# Altium PCB Pas PCB.PcbDoc
Units mil, origin at the board's own origin, x right, y up, seen from the top; angles counter-clockwise.
Board outline 4673 x 4194 mil, 2 copper layers (Top Layer, Bottom Layer), stack 59.091 mil thick; 45 components, 47 nets, 161 pads, 0 vias.
Unrouted connection lines stored in the file: 72.
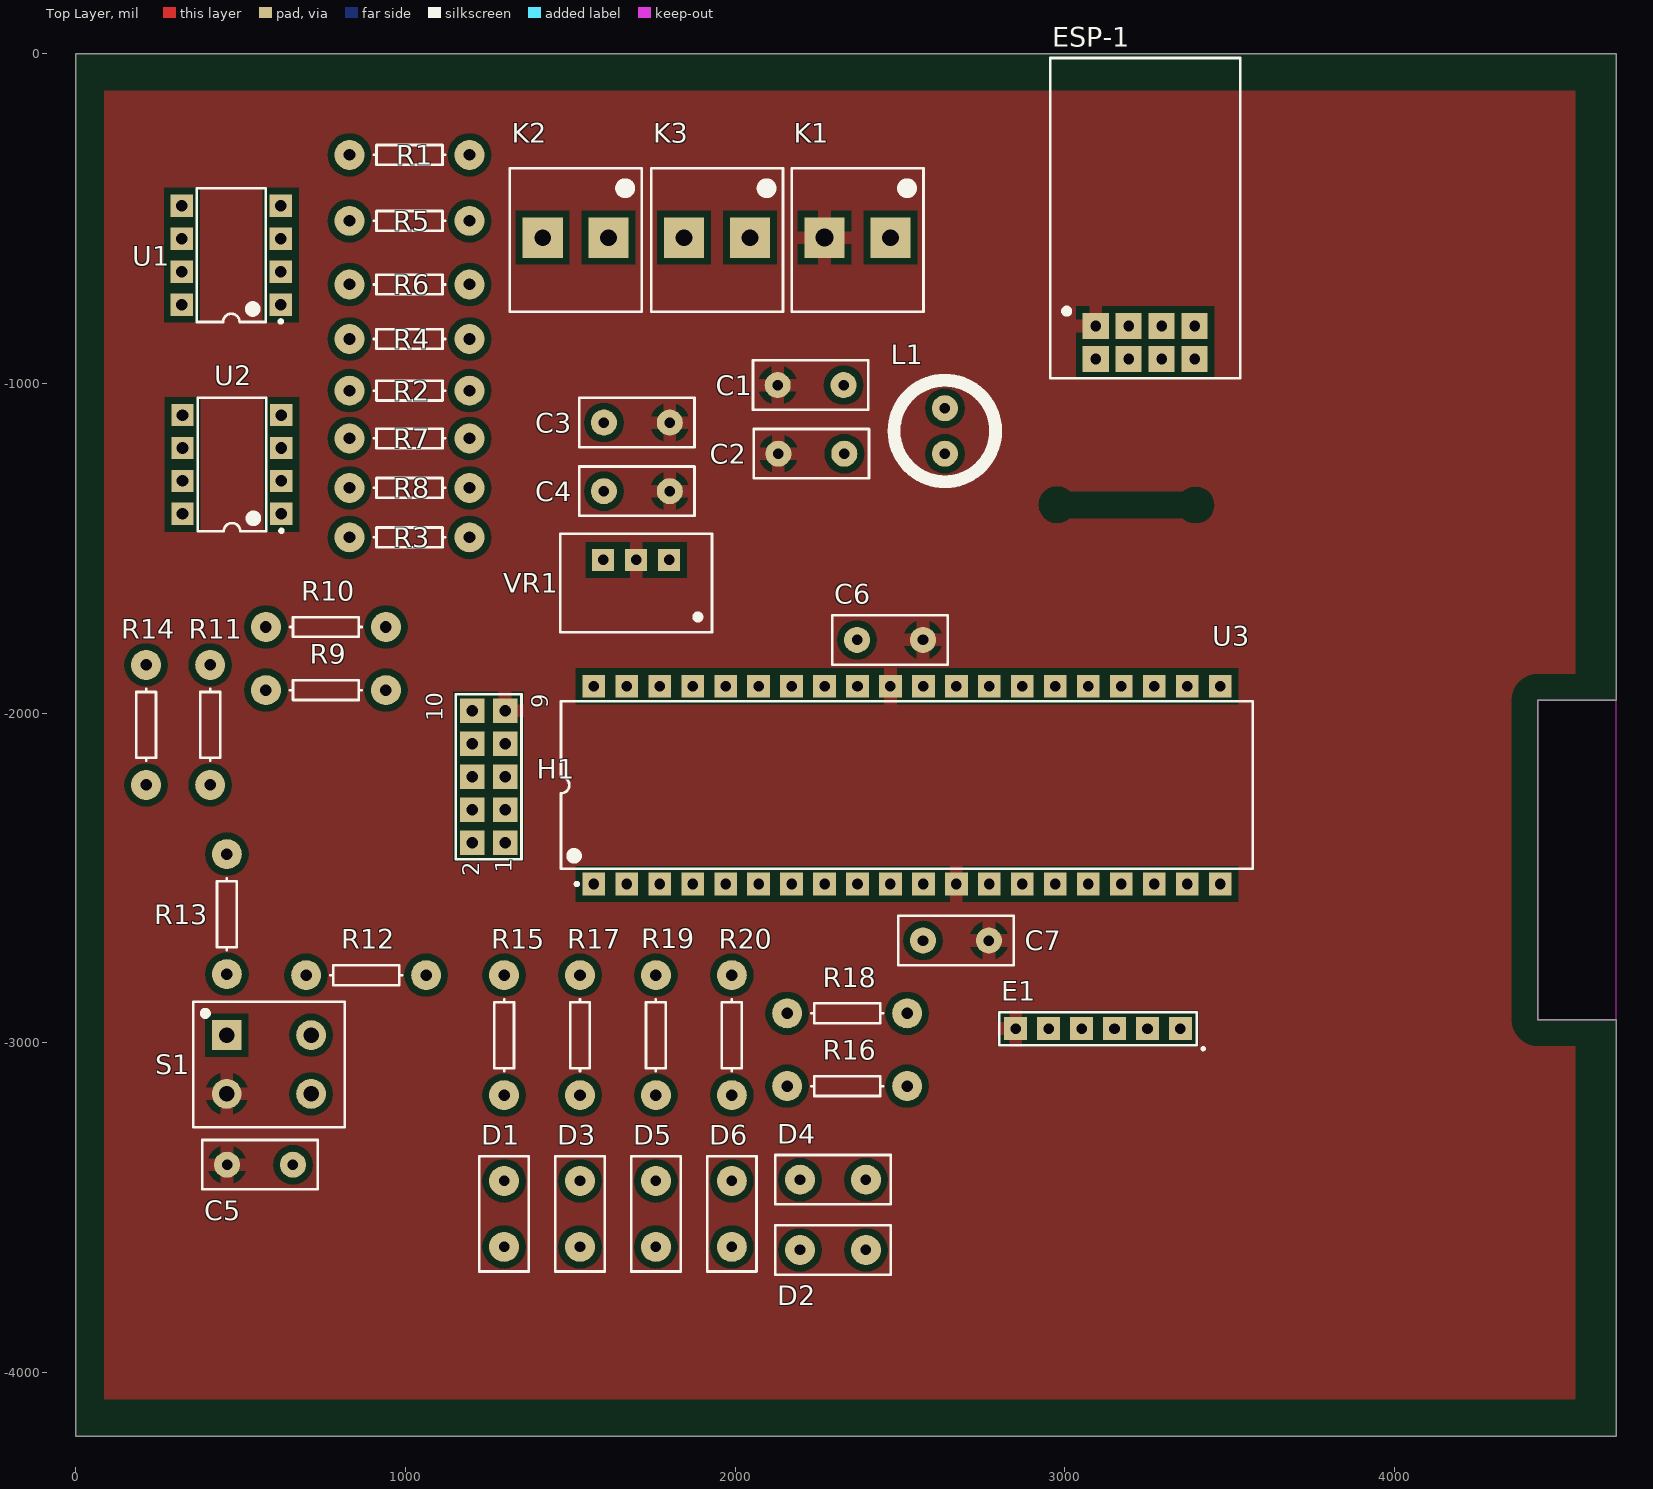
[diagram p0: Top Layer view]
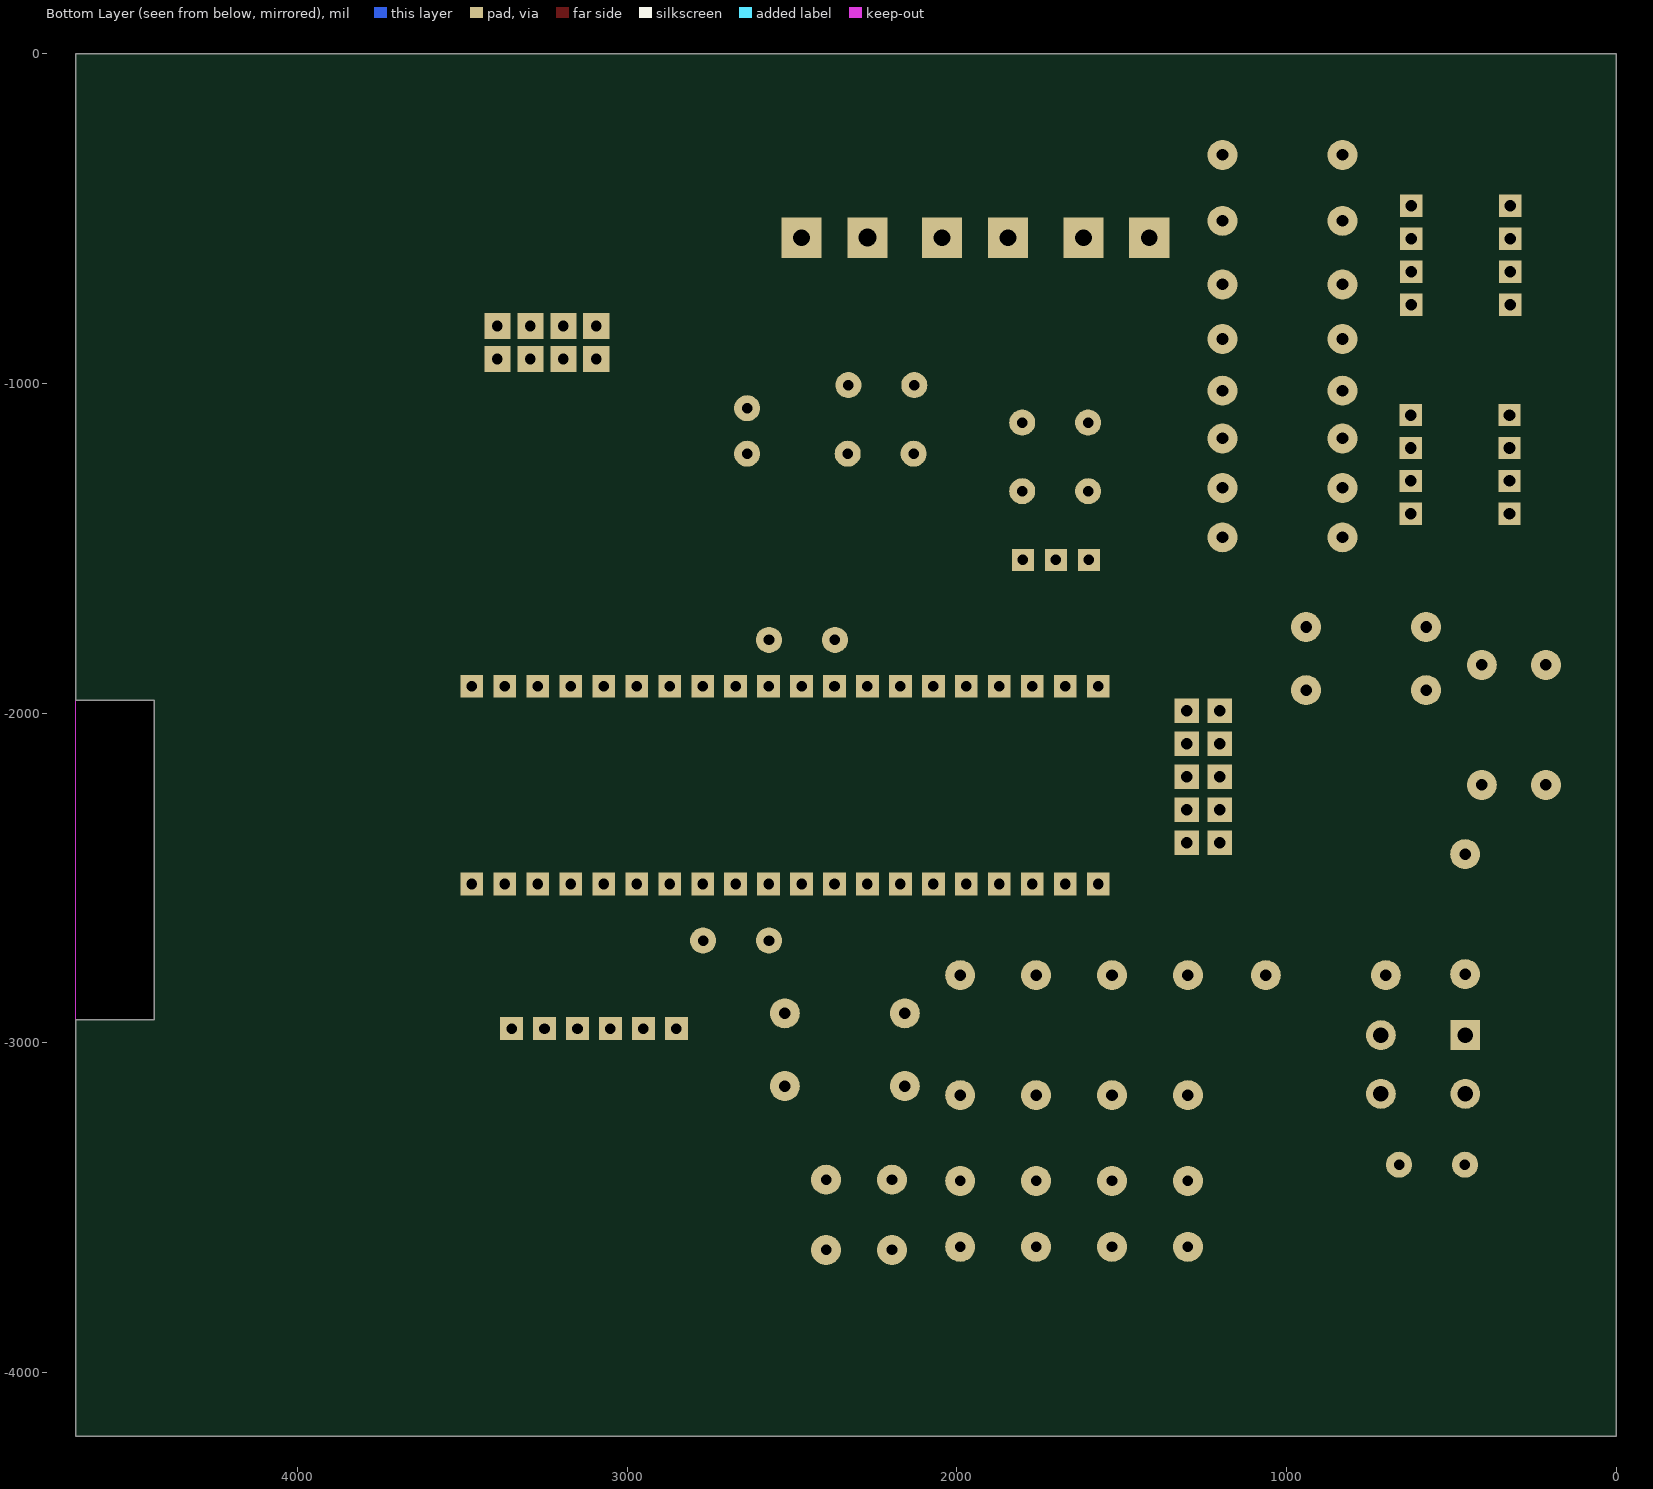
[diagram p1: Bottom Layer view, seen from below]

## Layer stack, top to bottom
Top Layer: signal copper 0.018
Dielectric 1: core 59.055, FR-4, Dk 4.2
Bottom Layer: signal copper 0.018

## Board outline
0,-4194 0,0 4673,0 4673,-1961 4435,-1961 4435,-2930 4673,-2930 4673,-4194
cut-out: 4435,-1961 4435,-2930 4673,-2930 4673,-1961

## Design rules (kind name [scope] priority, off if disabled: settings)
AssemblyTestPointUsage [All] p1 off:
AssemblyTestpoint [All] p1 off: testpointundercomponent=TRUE minsize=40 maxsize=100 preferedsize=60 minholesize=0 maxholesize=40 preferedholesize=32 testpointgrid=1 usegrid=TRUE gridtolerance=0.01 allowsidetop=TRUE allowsidebottom=TRUE
BoardOutlineClearance [Not InComponent('ESP-1')] p1: gap=20 ignorepadtopadclearanceinfootprint=FALSE
Clearance Clearance_1 [IsBoardCutoutRegion vs InPolygon] p1: gap=80 ignorepadtopadclearanceinfootprint=FALSE
Clearance [All] p2: gap=20 ignorepadtopadclearanceinfootprint=FALSE
ComponentClearance [All] p1: gap=20 collisioncheckmode=3 verticalgap=100000 showdistances=FALSE
FabricationTestPointUsage [All] p1 off: valid=0 allowmultiple=FALSE
FabricationTestpoint [All] p1 off: side=3 testpointundercomponent=TRUE minsize=40 maxsize=100 preferedsize=60 minholesize=0 maxholesize=40 preferedholesize=32 testpointgrid=1 allowsidetop=TRUE allowsidebottom=TRUE usegrid=TRUE gridtolerance=0.01
HoleSize [All] p1: absolutevalues=TRUE maxlimit=1380 minlimit=32 maxpercent=80.000 minpercent=20.000
PolygonConnect [All] p1: connectstyle=Relief reliefconductorwidth=40 reliefentries=4 polygonreliefangle="90 Angle" airgapwidth=20
RoutingTopology "Schematic Routing Topology_1" [InNetClass('Power_3.3V')] p1 off: topology=Daisy_Simple
RoutingTopology "Schematic Routing Topology" [InNetClass('Power_24V')] p2 off: topology=Daisy_Simple
RoutingTopology [All] p3: topology=Shortest
RoutingVias [All] p1: holewidth=48 width=71 viastyle="Through Hole" minholewidth=48 minwidth=71 maxholewidth=48 maxwidth=71
SolderMaskExpansion [All] p1: expansion=4
UnConnectedPin [Not InComponent('U3')] p1:
UnRoutedNet [All] p1: checkbadconnections=TRUE
Width Width_Power&GND [(InNetClass('Signal_24V') OR InNetClass('Power_3.3V') OR InNetClass('Power_24V') OR InNetClass('GND'))] p1 off: maxlimit=79 minlimit=31 preferedwidth=39
Width [All] p2: maxlimit=39 minlimit=39 preferedwidth=39
22 further rules are at their usual default settings.

## Classes and differential pairs
net class C7_Nets: 3.3V GND
net class C6_Nets: 3.3V GND
net class VR1_Nets: 3.3V GND NetC2_1
net class U3_Nets: 3.3V GND M\C\L\R\ NetE1_2 NetE1_3 NetH1_3 NetH1_5 NetR9_1 NetR10_1 NetR15_1 NetR16_1 NetR17_2 NetR18_1 NetR19_2 NetR20_2 NetU3_2 NetU3_7 NetU3_10 NetU3_13 NetU3_14 NetU3_15 NetU3_16 NetU3_17 NetU3_18 NetU3_19 NetU3_20 NetU3_21 NetU3_22 NetU3_27 NetU3_28 NetU3_33 NetU3_34 NetU3_35 NetU3_36 RC6 RC7 WIFIMOD_CH-PD WIFIMOD_RST
net class U2_Nets: 3.3V NetR2_1 NetR3_1 NetR7_1 NetR8_1 NetR9_2 NetR10_2
net class U1_Nets: 3.3V NetR1_2 NetR4_1 NetR5_1 NetR6_1 NetR11_2 NetR14_2
net class Signal_24V: NetK2_1 NetK2_2 NetK3_1 NetK3_2 NetR5_1 NetR6_1 NetR7_1 NetR8_1
net class S1_Nets: GND NetC5_1 NetS1_B NetS1_D
net class R20_Nets: NetD6_2 NetR20_2
net class R19_Nets: NetD5_2 NetR19_2
net class R18_Nets: NetD4_2 NetR18_1
net class R17_Nets: NetD3_2 NetR17_2
net class R16_Nets: NetD2_2 NetR16_1
net class R15_Nets: NetD1_2 NetR15_1
net class R14_Nets: NetH1_4 NetR14_2
net class R13_Nets: NetC5_1 NetH1_2
net class R12_Nets: 3.3V NetC5_1
net class R11_Nets: NetH1_6 NetR11_2
net class R10_Nets: NetR10_1 NetR10_2
net class R9_Nets: NetR9_1 NetR9_2
net class R8_Nets: NetK3_1 NetR8_1
net class R7_Nets: NetK3_2 NetR7_1
net class R6_Nets: NetK2_1 NetR6_1
net class R5_Nets: NetK2_2 NetR5_1
net class R4_Nets: NetC1_1 NetR4_1
net class R3_Nets: NetC1_1 NetR3_1
net class R2_Nets: NetC1_1 NetR2_1
net class R1_Nets: NetC1_1 NetR1_2
net class Power_24V: NetC1_1
net class Power_3.3V: 3.3V
net class Pas_Schematic_Nets: 3.3V GND M\C\L\R\ NetC1_1 NetC2_1 NetC5_1 NetD1_2 NetD2_2 NetD3_2 NetD4_2 NetD5_2 NetD6_2 NetE1_1 NetE1_2 NetE1_3 NetE1_4 NetE1_5 NetESP-1_2 NetESP-1_3 NetH1_2 NetH1_3 NetH1_4 NetH1_5 NetH1_6 NetH1_8 NetH1_10 NetK2_1 NetK2_2 NetK3_1 NetK3_2 NetR1_2 NetR2_1 NetR3_1 NetR4_1 NetR5_1 NetR6_1 NetR7_1 NetR8_1 NetR9_1 NetR9_2 NetR10_1 NetR10_2 NetR11_2 NetR14_2 NetR15_1 NetR16_1 NetR17_2 NetR18_1 NetR19_2 NetR20_2 NetS1_B NetS1_D NetU3_2 NetU3_7 NetU3_10 NetU3_13 NetU3_14 NetU3_15 NetU3_16 NetU3_17 NetU3_18 NetU3_19 NetU3_20 NetU3_21 NetU3_22 NetU3_27 NetU3_28 NetU3_33 NetU3_34 NetU3_35 NetU3_36 RC6 RC7 WIFIMOD_CH-PD WIFIMOD_RST
net class L1_Nets: NetC1_1 NetC2_1
net class K3_Nets: NetK3_1 NetK3_2
net class K2_Nets: NetK2_1 NetK2_2
net class K1_Nets: GND NetC1_1
net class H1_Nets: 3.3V GND M\C\L\R\ NetH1_2 NetH1_3 NetH1_4 NetH1_5 NetH1_6 NetH1_8 NetH1_10
net class ESP-1_Nets: 3.3V GND NetESP-1_2 NetESP-1_3 RC6 RC7 WIFIMOD_CH-PD WIFIMOD_RST
net class E1_Nets: GND NetE1_1 NetE1_2 NetE1_3 NetE1_4 NetE1_5
net class D6_Nets: 3.3V NetD6_2
net class D5_Nets: 3.3V NetD5_2
net class D4_Nets: 3.3V NetD4_2
net class D3_Nets: 3.3V NetD3_2
net class D2_Nets: 3.3V NetD2_2
net class D1_Nets: 3.3V NetD1_2
net class C5_Nets: GND NetC5_1
net class C4_Nets: 3.3V GND
net class C3_Nets: 3.3V GND
net class C2_Nets: GND NetC2_1
net class C1_Nets: GND NetC1_1

## Components (designator, comment, footprint, x,y, rotation, side; value= is the part's Value field where it differs from the comment)
C1 "Capacitor" RADIAL_0.2#1 2229.34,-1005.36 r180 top value=100pF
C2 "Capacitor" RADIAL_0.2#1 2231.34,-1213.36 r180 top value=100pF
C3 "Capacitor" RADIAL_0.2#1 1702,-1119 r0 top value=100pF
C4 "Capacitor" RADIAL_0.2#1 1702,-1327 r0 top value=100pF
C5 "Capacitor" RADIAL_0.2#1 559,-3370 r180 top value=100pF
C6 "Capacitor" RADIAL_0.2#1 2470,-1778 r0 top value=100pF
C7 "Capacitor" RADIAL_0.2#1 2670,-2690 r0 top value=100pF
D1 "LED1" RADIAL_0.2#2 1299.5,-3519 r90 top
D2 "LED1" RADIAL_0.2#2 2297,-3628.5 r0 top
D3 "LED1" RADIAL_0.2#2 1529.7,-3519 r90 top
D4 "LED1" RADIAL_0.2#2 2297,-3415.5 r0 top
D5 "LED1" RADIAL_0.2#2 1759.9,-3519 r90 top
D6 "LED1" RADIAL_0.2#2 1990.1,-3519 r90 top
E1 "E15_USB_T2" HDR1X6 3351,-2957 r180 top
ESP-1 "ESP-01" ESP-01 3094,-826 r0 top
H1 "Header 5X2" HDR2X5 1302.33,-2393 r90 top
K1 "Terminal Block" "Altech MV-252"#1 2471.5,-558 r180 top
K2 "Terminal Block" "Altech MV-252"#2 1616.5,-558 r180 top
K3 "Terminal Block" "Altech MV-252"#2 2045.5,-558 r180 top
L1 "Inductor" RADIAL_3.5 2636.34,-1075.36 r270 top value=3.3uH
R1 "Res1" AXIAL-0.3 1012.5,-307 r180 top value=1K
R2 "Res1" AXIAL-0.3 1012.5,-1022 r0 top value=1K
R3 "Res1" AXIAL-0.3 1012.5,-1467 r0 top value=1K
R4 "Res1" AXIAL-0.3 1012.5,-865.33 r0 top value=1K
R5 "Res1" AXIAL-0.3 1012.5,-507 r0 top value=1K
R6 "Res1" AXIAL-0.3 1012.5,-700 r0 top value=1K
R7 "Res1" AXIAL-0.3 1012.5,-1167 r0 top value=1K
R8 "Res1" AXIAL-0.3 1012.5,-1317 r0 top value=1K
R9 "Res1" AXIAL-0.3 759,-1930.5 r180 top value=1K
R10 "Res1" AXIAL-0.3 759,-1739 r180 top value=1K
R11 "Res1" AXIAL-0.3 408,-2036 r90 top value=1K
R12 "Res1" AXIAL-0.3 881,-2795 r0 top value=1K
R13 "Res1" AXIAL-0.3 458.5,-2610 r90 top value=1K
R14 "Res1" AXIAL-0.3 213.49,-2036 r90 top value=1K
R15 "Res1" AXIAL-0.3 1299.5,-2977 r270 top value=1K
R16 "Res1" AXIAL-0.3 2340,-3131.5 r0 top value=1K
R17 "Res1" AXIAL-0.3 1529.7,-2977 r90 top value=1K
R18 "Res1" AXIAL-0.3 2340,-2910.7 r0 top value=1K
R19 "Res1" AXIAL-0.3 1759.9,-2977 r90 top value=1K
R20 "Res1" AXIAL-0.3 1990.1,-2977 r90 top value=1K
S1 "SW-SPST" SW-SPST-1 586,-3066 r0 top
U1 "IlD74" DIP-8 472,-611 r180 top
U2 "IlD74" DIP-8 474,-1246 r180 top
U3 "PIC18F45K22-I/P" MCHP-PDIP-P40 2521.38,-2218.48 r90 top
VR1 "REG" SIP3 1800,-1535.5 r180 top

## Footprints (in the part's own frame and the unit in brackets; to place one, negate y for a bottom-side part, rotate by r counter-clockwise, add the part's x,y. Pads: shape width x height; smd on the part's side, far side on the other; paste and mask are expansions set on the pad)
"Altech MV-252"#1 [mil] "2 pin Terminal Block"
  rect 122x122 hole 51: 1(0,0)
  rect 122x122 hole 55: 2(200,0)
  silkscreen extent -100,-210 300,225
"Altech MV-252"#2 [mil] "2 pin Terminal Block"
  rect 122x122 hole 51: 1(0,0) 2(200,0)
  silkscreen extent -100,-210 300,225
AXIAL-0.3 [mil] "Axial Device, Thru-Hole; 2 Leads; 0.3 in Pin Spacing"
  round 91 hole 35: 1(-182,0) 2(182,0)
  silkscreen extent -109,-30 109,30
DIP-8 [mil] "DIP; 8 Leads; Row Spacing 7.62 mm; Pitch 2.54 mm"
  rect 68x68 hole 35: 1(-150,150) 2(-150,50) 3(-150,-50) 4(-150,-150) 5(150,-150) 6(150,-50) 7(150,50) 8(150,150)
  silkscreen extent -155,-203 104,206, body extent -142,-203 142,203, height 200
ESP-01 [mil] "Thru-Hole, 8 Leads, 2.54mm Pitch"
  rect 79x79 hole 32: 1(0,0) 2(100,0) 3(200,0) 4(300,0) 5(0,-100) 6(100,-100) 7(200,-100) 8(300,-100)
  silkscreen extent -138,-159 438,813
HDR1X6 [mil] "Connector; Header; 6 Position"
  rect 69x69 hole 32: 1(0,0) 2(100,0) 3(200,0) 4(300,0) 5(400,0) 6(500,0)
  silkscreen extent -73,-50 550,65
HDR2X5 [mil] "Connector; Header; 5x2 Position"
  rect 74x74 hole 35: 1(0,0) 2(0,100) 3(100,0) 4(100,100) 5(200,0) 6(200,100) 7(300,0) 8(300,100) 9(400,0) 10(400,100)
  silkscreen extent -50,-50 450,150
MCHP-PDIP-P40 [mil] "PDIP, 40-Leads, Body 51.75x13.53mm, Pitch 2.54mm"
  rect 69x69 hole 32: 1(-300,950) 2(-300,850) 3(-300,750) 4(-300,650) 5(-300,550) 6(-300,450) 7(-300,350) 8(-300,250) 9(-300,150) 10(-300,50) 11(-300,-50) 12(-300,-150) 13(-300,-250) 14(-300,-350) 15(-300,-450) 16(-300,-550) 17(-300,-650) 18(-300,-750) 19(-300,-850) 20(-300,-950) 21(300,-950) 22(300,-850) 23(300,-750) 24(300,-650) 25(300,-550) 26(300,-450) 27(300,-350) 28(300,-250) 29(300,-150) 30(300,-50) 31(300,50) 32(300,150) 33(300,250) 34(300,350) 35(300,450) 36(300,550) 37(300,650) 38(300,750) 39(300,850) 40(300,950)
  silkscreen extent -305,-1049 254,1049, body extent -305,-1047 305,1047, height 250
RADIAL_0.2#1 [mil] "Radial Cap, Thru-Hole; 2 Leads; 0.2 in Pin Spacing"
  round 79 hole 32: 1(-100,0) 2(100,0)
  silkscreen extent -175,-75 175,75
RADIAL_0.2#2 [mil] "Radial Cap, Thru-Hole; 2 Leads; 0.2 in Pin Spacing"
  round 91 hole 32: 1(-100,0) 2(100,0)
  silkscreen extent -175,-75 175,75
RADIAL_3.5 [mil] "RADIAL, 2 Leads, Pitch 3.5mm"
  round 79 hole 32: 1(0,0) 2(138,0)
  silkscreen extent -85,-154 223,154
SIP3 [mil] "SIP, 3 Leads, Pitch 2.54mm"
  rect 67x67 hole 32: 1(0,0) 2(100,0) 3(200,0)
  silkscreen extent -130,-80 330,220
SW-SPST-1 [mil] "DIP. 4 Leads, Row spacing 6.50mm, Pitch 4.50mm"
  rect 90.55x90.55 hole 47: 1(-128,89)
  round 90.55 hole 47: 2(128,89) 3(-128,-89) 4(128,-89)
  silkscreen extent -230,-190 230,190

## Part data
D1 D2 D3 D4 D5 D6: "Typical RED GaAs LED", LatestRevisionDate=08-Jul-2005, LatestRevisionNote="Mech Layer 1 removed.", PackageDescription="LED; 2 Leads", PackageReference=LED-1, Published=8-Jun-2000, Publisher="Altium Limited"
E1: "USB-To-Serial Converter", LatestRevisionDate=17-Jul-2002, LatestRevisionNote="Re-released for DXP Platform.", Publisher="Altium Limited"
ESP-1: "802.11b/g/n Wi-Fi SOC module", LatestRevisionDate=17-Jul-2002, LatestRevisionNote="Re-released for DXP Platform.", Publisher="Altium Limited"
H1: "Header, 5-Pin, Dual row", LatestRevisionDate=17-Jul-2002, LatestRevisionNote="Re-released for DXP Platform.", Publisher="Altium Limited"
R1 R2 R3 R4 R5 R6 R7 R8 R9 R10 R11 R12 R13 R14 R15 R16 R17 R18 R19 R20: "Resistor", LatestRevisionDate=17-Jul-2002, LatestRevisionNote="Re-released for DXP Platform.", PackageDescription="Axial Device, Thru-Hole; 2 Leads; 0.3 in Pin Spacing", PackageReference=AXIAL-0.3, Published=8-Jun-2000, Publisher="Altium Limited"
S1: "4-pin Single-Pole, Single-Throw Switch", LatestRevisionDate=17-Jul-2002, LatestRevisionNote="Re-released for DXP Platform.", PackageDescription="Switch; 2 Leads", PackageReference=SPST-2, Published=24-Mar-1999, Publisher="Altium Limited"
U1 U2: "8-pin Dual Optocoupler with NPN Transistor Output", DatasheetVersion=Nov-2003, LatestRevisionDate=04-Mar-2005, LatestRevisionNote="Sch pins 3 & 4 Swapped.", PackageReference=DIP-4, Published=24-Mar-1999, Publisher="Altium Limited"
U3: "Low-Power, High-Performance Microcontroller with XLP Technology, 64 MHz, 35 I/O, -40 to 85 degC, 40-pin PDIP (P40), Tube", Manufacturer=Microchip, Operation Voltage Range="2.3V - 5.5V", # of A/D Channels=28, ComponentLink1Description=Datasheet, ComponentLink1URL=http://ww1.microchip.com/downloads/en/DeviceDoc/41412F.pdf, ComponentLink2Description="Package Specification", ComponentLink2URL=http://www.microchip.com/stellent/groups/techpub_sg/documents/packagingspec/en012702.pdf, ComponentLink3Description="URL Link1", ComponentLink3URL="Product URL:http://www.microchip.com/datasheet/PIC18F45K22", DatasheetVersion="Rev. F", Digital Communication="2 -A/E/USART, 2 -MSSP(SPI/I2C)", EEPROM Data Memory (bytes)=256, I/O Pins=35, Internal Oscillator="16 MHz, 31 kHz", Max. CPU Speed MHz=64, Memory Type=Flash, Mounting Technology="Through Hole", PackageDescription="40-Lead Plastic Dual In-Line Package, Body 51.75 x 13.53 mm, Pitch 2.54 mm", PackageReference=PDIP-P40, PackageVersion="C04-016B, 04/2013", Packing=TUBE, PartNumber=PIC18F45K22-I/P, Program Memory KBytes=32, Program Memory KWords=16, RAM=1536, RoHS=TRUE, Timers="3 - 8-bit, 4 - 16-bit"
VR1: library part R-783.3-0.5, "Non-Isolated DC/DC Converters 0.5A DC/DC REG 4.75-34Vin 3.3Vout"
C1 C2 C3 C4 C5 C6 C7: LatestRevisionDate=17-Jul-2002, LatestRevisionNote="Re-released for DXP Platform.", PackageDescription="Radial Cap, Thru-Hole; 2 Leads; 0.3 in Pin Spacing", PackageReference=RAD-0.3, Published=8-Jun-2000, Publisher="Altium Limited"
L1: Code_IEC=1005, Code_JEITA=0402, LatestRevisionDate=29-May-2009, LatestRevisionNote="IPC-7351 Footprint Added.", PackageDescription="Chip Inductor", PackageReference=0402-A, Published=8-Jun-2000, Publisher="Altium Limited"

## Nets (pads, with @x,y where several pads share a name; then routed paths per layer and width w, separated by ;. In a path a pad name is that pad's centre, name@x,y a point inside that pad or via, vN(x,y) a via of type N, cw(c..) or ccw(c..) an arc to the next point about the centre after c; other vN are vias at no path point)
3.3V: C3.1 C4.1 C6.1 C7.1 D1.1 D2.1 D3.1 D4.1 D5.1 D6.1 ESP-1.8 H1.7 R12.2 U1.6 U1.7 U2.6 U2.7 U3.11 U3.32 VR1.3
GND: C1.2 C2.2 C3.2 C4.2 C5.2 C6.2 C7.2 E1.6 ESP-1.1 H1.9 K1.2 S1.3 U3.12 U3.31 VR1.2
M\C\L\R\: H1.1 U3.1
NetC1_1: C1.1 K1.1 L1.1 R1.1 R2.2 R3.2 R4.2
NetC2_1: C2.1 L1.2 VR1.1
NetC5_1: C5.1 R12.1 R13.1 S1.1
NetD1_2: D1.2 R15.2
NetD2_2: D2.2 R16.2
NetD3_2: D3.2 R17.1
NetD4_2: D4.2 R18.2
NetD5_2: D5.2 R19.1
NetD6_2: D6.2 R20.1
NetE1_2: E1.2 U3.30
NetE1_3: E1.3 U3.29
NetH1_2: H1.2 R13.2
NetH1_3: H1.3 U3.40
NetH1_4: H1.4 R14.1
NetH1_5: H1.5 U3.39
NetH1_6: H1.6 R11.1
NetK2_1: K2.1 R6.2
NetK2_2: K2.2 R5.2
NetK3_1: K3.1 R8.2
NetK3_2: K3.2 R7.2
NetR1_2: R1.2 U1.4
NetR2_1: R2.1 U2.4
NetR3_1: R3.1 U2.1
NetR4_1: R4.1 U1.1
NetR5_1: R5.1 U1.3
NetR6_1: R6.1 U1.2
NetR7_1: R7.1 U2.3
NetR8_1: R8.1 U2.2
NetR9_1: R9.1 U3.37
NetR9_2: R9.2 U2.8
NetR10_1: R10.1 U3.38
NetR10_2: R10.2 U2.5
NetR11_2: R11.2 U1.8
NetR14_2: R14.2 U1.5
NetR15_1: R15.1 U3.3
NetR16_1: R16.1 U3.8
NetR17_2: R17.2 U3.4
NetR18_1: R18.1 U3.7
NetR19_2: R19.2 U3.5
NetR20_2: R20.2 U3.6
RC6: ESP-1.4 U3.25
RC7: ESP-1.5 U3.26
WIFIMOD_CH-PD: ESP-1.6 U3.28
WIFIMOD_RST: ESP-1.7 U3.27
pads on no net: E1.1 E1.4 E1.5 ESP-1.2 ESP-1.3 H1.8 H1.10 S1.2 S1.4 U3.2 U3.9 U3.10 U3.13 U3.14 U3.15 U3.16 U3.17 U3.18 U3.19 U3.20 U3.21 U3.22 U3.23 U3.24 U3.33 U3.34 U3.35 U3.36

## Polygon pours and split planes (outlines as drawn)
GND on Top Layer "Top Layer-GND" (solid, remove dead copper, pour order 0): 86,-4082 86,-112 4548.5,-112 4548.5,-4082

## Silkscreen, mask and mechanical layers (free items; w line width, h text height)
Route Tool Path:
  lines w7.87: 0,-4194 4673,-4194 4673,-2930 4435,-2930 4435,-1961 4673,-1961 4673,0 0,0 0,-4194
  lines w79: -39.5,-4194 ccw(c0,-4194) 0,-4233.5 ; -39.5,-4194 ccw(c0,-4194) 0,-4233.5 ; -39.5,-4194 -39.5,0 ; -39.5,0 cw(c0,0) 0,39.5 ; -39.5,0 cw(c0,0) 0,39.5 ; 0,-4233.5 4673,-4233.5 ; 0,39.5 4673,39.5 ; 4673,-4233.5 ccw(c4673,-4194) 4712.5,-4194 ; 4673,-4233.5 ccw(c4673,-4194) 4712.5,-4194 ; 4673,-2890.5 cw(c4673,-2930) 4712.5,-2930 ; 4673,-2890.5 cw(c4673,-2930) 4712.5,-2930 ; 4673,-2890.5 4474.5,-2890.5 4474.5,-2000.5 4673,-2000.5 ; 4673,-2000.5 ccw(c4673,-1961) 4712.5,-1961 ; 4673,-2000.5 ccw(c4673,-1961) 4712.5,-1961 ; 4673,39.5 cw(c4673,0) 4712.5,0 ; 4673,39.5 cw(c4673,0) 4712.5,0 ; 4712.5,-4194 4712.5,-2930 ; 4712.5,-1961 4712.5,0
Drill Drawing:
  circle w10: c-1132.88,1659.83 r20
  circle w10: c-1132.88,1659.83 r33.33
  lines w10: -1166.21,593.17 -1149.54,593.17 -1149.54,576.5 -1116.21,576.5 -1116.21,593.17 -1099.54,593.17 -1099.54,626.5 -1116.21,626.5 -1116.21,643.17 -1149.54,643.17 -1149.54,626.5 -1166.21,626.5 -1166.21,593.17 ; -1166.21,793.17 -1099.54,793.17 -1132.88,726.5 -1166.21,793.17 ; -1166.21,893.17 -1149.54,893.17 -1132.88,876.5 -1116.21,893.17 -1099.54,893.17 -1116.21,909.83 -1099.54,926.5 -1116.21,926.5 -1132.88,943.17 -1149.54,926.5 -1166.21,926.5 -1149.54,909.83 -1166.21,893.17 ; -1166.21,1026.5 -1099.54,1026.5 -1099.54,1093.17 -1166.21,1093.17 -1166.21,1026.5 ; -1166.21,1209.83 -1132.88,1176.5 -1099.54,1209.83 -1132.88,1243.17 -1166.21,1209.83 ; -1166.21,1326.5 -1166.21,1343.17 -1149.54,1359.83 -1166.21,1376.5 -1166.21,1393.17 -1149.54,1393.17 -1132.88,1376.5 -1116.21,1393.17 -1099.54,1393.17 -1099.54,1376.5 -1116.21,1359.83 -1099.54,1343.17 -1099.54,1326.5 -1116.21,1326.5 -1132.88,1343.17 -1149.54,1326.5 -1166.21,1326.5 ; -1166.21,1476.5 -1099.54,1476.5 -1099.54,1543.17 -1166.21,1543.17 -1166.21,1476.5 ; -1152.88,1039.83 -1112.88,1039.83 -1112.88,1079.83 -1152.88,1079.83 -1152.88,1039.83
  lines w15: -1226,531.5 9644.97,531.5 ; -1226,1731.5 9644.97,1731.5 ; -675.12,381.5 -675.12,1881.5 ; -85.28,381.5 -85.28,1881.5 ; 1014.4,381.5 1014.4,1881.5 ; 1520.28,381.5 1520.28,1881.5 ; 2254.08,381.5 2254.08,1881.5 ; 3753.63,381.5 3753.63,1881.5 ; 4343.48,381.5 4343.48,1881.5 ; 5089.28,381.5 5089.28,1881.5 ; 6078.99,381.5 6078.99,1881.5 ; 6932.75,381.5 6932.75,1881.5 ; 8266.36,381.5 8266.36,1881.5 ; -1226,381.5 9644.97,381.5 9644.97,1881.5 -1226,1881.5 -1226,381.5
  text "Symbol" at -1136,1776.5 h72
  text "Count" at -630.12,1776.5 h72
  text "Hole Size" at -40.28,1776.5 h72
  text "Plated" at 1059.4,1776.5 h72
  text "Hole Type" at 1565.28,1776.5 h72
  text "Drill Layer Pair" at 2299.08,1776.5 h72
  text "Via/Pad" at 3798.63,1776.5 h72
  text "Pad Shape" at 4388.48,1776.5 h72
  text "Template" at 5134.28,1776.5 h72
  text "Description" at 6123.99,1776.5 h72
  text "Hole Tolerance (+)" at 6977.75,1776.5 h72
  text "Hole Tolerance (-)" at 8311.36,1776.5 h72
  text "1" at -630.12,1626.5 h60
  text "55.00mil (1.397mm)" at -40.28,1626.5 h60
  text "PTH" at 1059.4,1626.5 h60
  text "Round" at 1565.28,1626.5 h60
  text "Top Layer - Bottom Layer" at 2299.08,1626.5 h60
  text "Pad" at 3798.63,1626.5 h60
  text "Rectangle" at 4388.48,1626.5 h60
  text "s310h140(Tol0-0)" at 5134.28,1626.5 h60
  text "0.00mil (0.000mm)" at 6977.75,1626.5 h60
  text "0.00mil (0.000mm)" at 8311.36,1626.5 h60
  text "2" at -630.12,1476.5 h60
  text "48.00mil (1.219mm)" at -40.28,1476.5 h60
  text "PTH" at 1059.4,1476.5 h60
  text "Round" at 1565.28,1476.5 h60
  text "Top Layer - Bottom Layer" at 2299.08,1476.5 h60
  text "Via" at 3798.63,1476.5 h60
  text "Rounded" at 4388.48,1476.5 h60
  text "v180h122" at 5134.28,1476.5 h60
  text "3" at -630.12,1326.5 h60
  text "32.00mil (0.813mm)" at -40.28,1326.5 h60
  text "PTH" at 1059.4,1326.5 h60
  text "Round" at 1565.28,1326.5 h60
  text "Top Layer - Bottom Layer" at 2299.08,1326.5 h60
  text "Pad" at 3798.63,1326.5 h60
  text "Rectangle" at 4388.48,1326.5 h60
  text "s170h81(Tol10-8)" at 5134.28,1326.5 h60
  text "4.00mil (0.102mm)" at 6977.75,1326.5 h60
  text "3.00mil (0.076mm)" at 8311.36,1326.5 h60
  text "4" at -630.12,1176.5 h60
  text "47.00mil (1.194mm)" at -40.28,1176.5 h60
  text "PTH" at 1059.4,1176.5 h60
  text "Round" at 1565.28,1176.5 h60
  text "Top Layer - Bottom Layer" at 2299.08,1176.5 h60
  text "Pad" at 3798.63,1176.5 h60
  text "(Mixed)" at 4388.48,1176.5 h60
  text "(Mixed)" at 5134.28,1176.5 h60
  text "8.00mil (0.203mm)" at 6977.75,1176.5 h60
  text "8.00mil (0.203mm)" at 8311.36,1176.5 h60
  text "5" at -630.12,1026.5 h60
  text "51.00mil (1.295mm)" at -40.28,1026.5 h60
  text "PTH" at 1059.4,1026.5 h60
  text "Round" at 1565.28,1026.5 h60
  text "Top Layer - Bottom Layer" at 2299.08,1026.5 h60
  text "Pad" at 3798.63,1026.5 h60
  text "Rectangle" at 4388.48,1026.5 h60
  text "s310h130(Tol0-0)" at 5134.28,1026.5 h60
  text "0.00mil (0.000mm)" at 6977.75,1026.5 h60
  text "0.00mil (0.000mm)" at 8311.36,1026.5 h60
  text "26" at -630.12,876.5 h60
  text "32.00mil (0.813mm)" at -40.28,876.5 h60
  text "PTH" at 1059.4,876.5 h60
  text "Round" at 1565.28,876.5 h60
  text "Top Layer - Bottom Layer" at 2299.08,876.5 h60
  text "Pad" at 3798.63,876.5 h60
  text "Rounded" at 4388.48,876.5 h60
  text "(Mixed)" at 5134.28,876.5 h60
  text "0.00mil (0.000mm)" at 6977.75,876.5 h60
  text "0.00mil (0.000mm)" at 8311.36,876.5 h60
  text "56" at -630.12,726.5 h60
  text "32.00mil (0.813mm)" at -40.28,726.5 h60
  text "PTH" at 1059.4,726.5 h60
  text "Round" at 1565.28,726.5 h60
  text "Top Layer - Bottom Layer" at 2299.08,726.5 h60
  text "Pad" at 3798.63,726.5 h60
  text "(Mixed)" at 4388.48,726.5 h60
  text "(Mixed)" at 5134.28,726.5 h60
  text "66" at -630.12,576.5 h60
  text "35.00mil (0.889mm)" at -40.28,576.5 h60
  text "PTH" at 1059.4,576.5 h60
  text "Round" at 1565.28,576.5 h60
  text "Top Layer - Bottom Layer" at 2299.08,576.5 h60
  text "Pad" at 3798.63,576.5 h60
  text "(Mixed)" at 4388.48,576.5 h60
  text "(Mixed)" at 5134.28,576.5 h60
  text "163 Total" at -630.12,426.5 h60

## Text inside footprints (layer, text, board x,y; h text height)
H1: Top Overlay "2" at 1223.33,-2495 h50 r90; Top Overlay "1" at 1323.33,-2484 h50 r90; Top Overlay "9" at 1433.33,-1985 h50 r90; Top Overlay "10" at 1113.33,-2025 h50 r90